# EAGLE board LSN Motherboard (EAGLE 6.2)
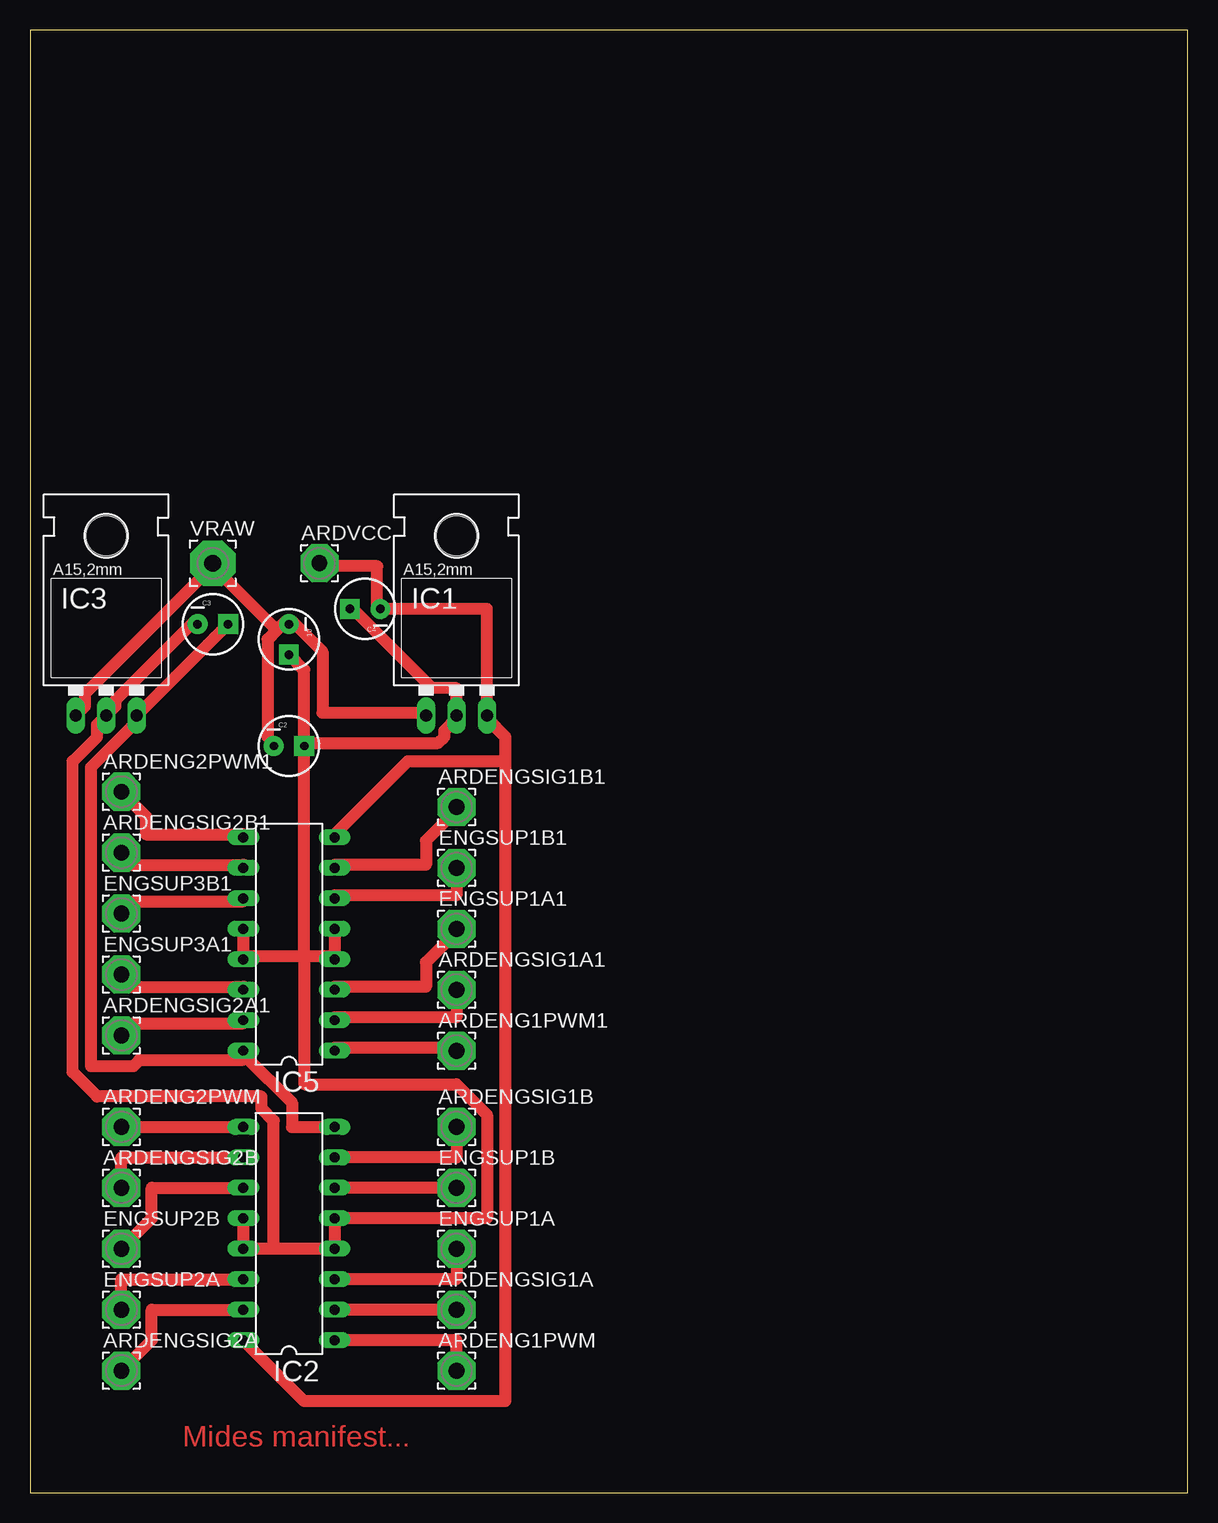
[diagram p0: board, top side]

Size 96.52 x 121.92 mm. Coordinates in mm from the lower left corner, seen from the top.
Outline: 0,0 96.52,0 96.52,121.92 0,121.92 0,0
Copper layers (1*16): Top 0.035mm / dielectric 1.5mm / Bottom 0.035mm
Design rules: minimum track width 40mil, minimum drill 24mil, track to track 10mil, track to pad 10mil, pad to pad 10mil, via to via 10mil, smd to smd 8mil, copper to edge 10mil, drill to drill 8mil, minimum pad ring 10mil, minimum via ring 8mil, stop-mask expansion 4mil, vias tented up to drill 0mil, thermal gap 10mil

## Footprints (pad centres in the part's own frame; a part is rotated, then mirrored left to right if it is on the bottom)
CPOL-RADIAL-10UF-25V = drill 0.7 pad 1.651 square: 1 1.27,0 | drill 0.7 pad 1.651: 2 -1.27,0
3,17/1,3 = drill 1.321 pad 3.175 octagon: 1 0,0
78XXL = drill 1.016 long: GND 0,-3.81; IN -2.54,-3.81; OUT 2.54,-3.81 | hole 3.302: 0,11.176
DIP16 = drill 0.813 long: 1 -10.16,-3.81; 2 -7.62,-3.81; 3 -5.08,-3.81; 4 -2.54,-3.81; 5 0,-3.81; 6 2.54,-3.81; 7 5.08,-3.81; 8 7.62,-3.81; 9 7.62,3.81; 10 5.08,3.81; 11 2.54,3.81; 12 0,3.81; 13 -2.54,3.81; 14 -5.08,3.81; 15 -7.62,3.81; 16 -10.16,3.81
3,81/1,4 = drill 1.397 pad 3.81 octagon: 1 0,0

## Placement (x,y rotation side)
10  10  [CPOL-RADIAL-10UF-25V]  21.59,71.12 270 top
ARDENG1PWM  Eng 1 Pwm  [3,17/1,3]  35.56,10.16 0 top
ARDENG1PWM1  Eng 1 Pwm  [3,17/1,3]  35.56,36.83 0 top
ARDENG2PWM  Eng2 Pwm  [3,17/1,3]  7.62,30.48 0 top
ARDENG2PWM1  Eng2 Pwm  [3,17/1,3]  7.62,58.42 0 top
ARDENGSIG1A  Eng Sig 1A  [3,17/1,3]  35.56,15.24 0 top
ARDENGSIG1A1  Eng Sig 1A  [3,17/1,3]  35.56,41.91 0 top
ARDENGSIG1B  Eng Sig 1B  [3,17/1,3]  35.56,30.48 0 top
ARDENGSIG1B1  Eng Sig 1B  [3,17/1,3]  35.56,57.15 0 top
ARDENGSIG2A  Eng Sig 2A  [3,17/1,3]  7.62,10.16 0 top
ARDENGSIG2A1  Eng Sig 2A  [3,17/1,3]  7.62,38.1 0 top
ARDENGSIG2B  Eng Sig 2B  [3,17/1,3]  7.62,25.4 0 top
ARDENGSIG2B1  Eng Sig 2B  [3,17/1,3]  7.62,53.34 0 top
ARDVCC  Ard VCC  [3,17/1,3]  24.13,77.47 0 top
C2  10  [CPOL-RADIAL-10UF-25V]  21.59,62.23 0 top
C3  .1  [CPOL-RADIAL-10UF-25V]  15.24,72.39 0 top
C4  .1  [CPOL-RADIAL-10UF-25V]  27.94,73.66 180 top
ENGSUP1A  Eng Sup 1A  [3,17/1,3]  35.56,20.32 0 top
ENGSUP1A1  Eng Sup 1A  [3,17/1,3]  35.56,46.99 0 top
ENGSUP1B  Eng Sup 1B  [3,17/1,3]  35.56,25.4 0 top
ENGSUP1B1  Eng Sup 1B  [3,17/1,3]  35.56,52.07 0 top
ENGSUP2A  Eng Sup 2A  [3,17/1,3]  7.62,15.24 0 top
ENGSUP2B  Eng Sup 2B  [3,17/1,3]  7.62,20.32 0 top
ENGSUP3A1  Eng Sup 2A  [3,17/1,3]  7.62,43.18 0 top
ENGSUP3B1  Eng Sup 2B  [3,17/1,3]  7.62,48.26 0 top
IC1  5v  [78XXL]  35.56,68.58 0 top
IC2  SN754410  [DIP16]  21.59,22.86 90 top
IC3  12v  [78XXL]  6.35,68.58 0 top
IC5  SN754410  [DIP16]  21.59,46.99 90 top
VRAW  VRaw  [3,81/1,4]  15.24,77.47 0 top

## Library data of the parts
10 C2-C4 = SparkFun
ARDENG1PWM ARDENG1PWM1 ARDENG2PWM ARDENG2PWM1 ARDENGSIG1A ARDENGSIG1A1 ARDENGSIG1B ARDENGSIG1B1 ARDENGSIG2A ARDENGSIG2A1 ARDENGSIG2B ARDENGSIG2B1 ARDVCC ENGSUP1A ENGSUP1A1 ENGSUP1B ENGSUP1B1 ENGSUP2A ENGSUP2B ENGSUP3A1 ENGSUP3B1 VRAW = wirepad
IC1 IC3 = v-reg
IC2 IC5 = HBridge

## Nets
ARDENGSIG1A: ARDENGSIG1A.1 IC2.2
ARDENGSIG1A1: ARDENGSIG1A1.1 IC5.2
ARDENGSIG1B: ARDENGSIG1B.1 IC2.7
ARDENGSIG1B1: ARDENGSIG1B1.1 IC5.7
ARDENGSIG2B: ARDENGSIG2B.1 IC2.10
ARDENGSIG2B1: ARDENGSIG2B1.1 IC5.10
GND: 10.1 C2.1 C3.2 C4.1 IC1.GND IC2.4 IC2.5 IC2.12 IC2.13 IC3.GND IC5.4 IC5.5 IC5.12 IC5.13
N$2: 10.2 C2.2 IC1.IN IC3.IN VRAW.1
N$3: ARDENG1PWM.1 IC2.1
N$4: ARDENG2PWM.1 IC2.9
N$6: ARDENGSIG2A.1 IC2.15
N$7: ARDENG1PWM1.1 IC5.1
N$8: ENGSUP1A.1 IC2.3
N$9: ENGSUP1B.1 IC2.6
N$10: ENGSUP2B.1 IC2.11
N$11: ENGSUP2A.1 IC2.14
N$12: C3.1 IC2.8 IC3.OUT IC5.16
N$13: ARDENG2PWM1.1 IC5.9
N$14: ARDENGSIG2A1.1 IC5.15
N$15: ENGSUP1A1.1 IC5.3
N$16: ENGSUP1B1.1 IC5.6
N$17: ENGSUP3B1.1 IC5.11
N$18: ENGSUP3A1.1 IC5.14
N$19: ARDVCC.1 C4.2 IC1.OUT IC2.16 IC5.8

## Tracks (layer width: path | path; a pad name or v marks a point on that pad's centre or on a via)
ARDENGSIG1A
  Top 1.016: ARDENGSIG1A.1 IC2.2
ARDENGSIG1A1
  Top 1.016: ARDENGSIG1A1.1 35.56,39.62 25.4,39.62 IC5.2
ARDENGSIG1B
  Top 1.016: IC2.7 35.56,27.94 ARDENGSIG1B.1
ARDENGSIG1B1
  Top 1.016: IC5.7 25.4,52.32 33.02,52.32 33.02,54.36 35.56,56.9 ARDENGSIG1B1.1
ARDENGSIG2B
  Top 1.016: IC2.10 7.62,27.94 ARDENGSIG2B.1
ARDENGSIG2B1
  Top 1.016: ARDENGSIG2B1.1 7.62,52.32 17.78,52.32 IC5.10
GND
  Top 1.016: 22.86,62.48 34.04,62.48 34.54,62.99 34.54,63.5 35.56,64.52 IC1.GND 35.56,67.06 33.53,67.06 26.92,73.66 C4.1 | 10.1 22.86,68.58 22.86,62.48 | 22.86,62.48 C2.1 22.86,44.7 | C3.2 13.72,72.64 7.11,66.04 7.11,65.53 IC3.GND 5.59,64.01 5.59,62.99 3.56,60.96 3.56,35.05 5.59,33.02 19.3,33.02 19.3,32 20.32,30.99 20.32,20.32 | IC2.12 IC2.13 20.32,20.32 | 20.32,20.32 IC2.4 IC2.5 38.1,22.86 38.1,31.5 35.56,34.04 22.86,34.04 22.86,44.7 | IC5.12 17.78,44.7 | IC5.5 25.4,44.7 | 25.4,44.7 22.86,44.7 | 22.86,44.7 17.78,44.7 | 17.78,44.7 IC5.13 | 25.4,44.7 IC5.4
N$2
  Top 1.016: IC1.IN 33.02,65.02 24.38,65.02 24.38,70.1 21.84,72.64 10.2 21.34,72.64 20.57,71.88 | 20.57,71.88 19.81,71.12 19.81,62.99 20.32,62.48 C2.2 | IC3.IN 4.57,65.53 4.57,66.55 15.24,77.22 | 15.24,77.22 20.57,71.88 | 15.24,77.22 VRAW.1
N$3
  Top 1.016: IC2.1 35.56,12.7 ARDENG1PWM.1
N$4
  Top 1.016: ARDENG2PWM.1 IC2.9
N$6
  Top 1.016: IC2.15 10.16,15.24 10.16,12.7 ARDENGSIG2A.1
N$7
  Top 1.016: IC5.1 25.4,37.08 35.56,37.08 ARDENG1PWM1.1
N$8
  Top 1.016: IC2.3 35.56,17.78 ENGSUP1A.1
N$9
  Top 1.016: ENGSUP1B.1 IC2.6
N$10
  Top 1.016: IC2.11 10.16,25.4 10.16,22.86 ENGSUP2B.1
N$11
  Top 1.016: IC2.14 7.62,17.78 ENGSUP2A.1
N$12
  Top 1.016: IC2.8 21.84,30.48 21.84,32.51 18.03,36.32 | 18.03,36.32 17.78,36.58 IC5.16 | C3.1 IC3.OUT 8.64,64.52 8.64,64.01 5.08,60.45 5.08,35.56 8.64,35.56 9.14,36.07 17.78,36.07 18.03,36.32
N$13
  Top 1.016: ARDENG2PWM1.1 9.65,56.39 9.65,54.86 17.78,54.86 IC5.9
N$14
  Top 1.016: ARDENGSIG2A1.1 7.62,39.12 17.78,39.12 IC5.15
N$15
  Top 1.016: IC5.3 25.4,42.16 33.02,42.16 33.02,44.2 35.56,46.74 ENGSUP1A1.1
N$16
  Top 1.016: ENGSUP1B1.1 35.56,49.78 25.4,49.78 IC5.6
N$17
  Top 1.016: ENGSUP3B1.1 7.62,49.28 17.78,49.28 IC5.11
N$18
  Top 1.016: ENGSUP3A1.1 7.62,42.16 17.78,42.16 IC5.14
N$19
  Top 1.016: IC2.16 22.86,7.62 39.62,7.62 39.62,60.96 | 39.62,60.96 39.62,62.99 38.1,64.52 IC1.OUT 38.1,73.66 C4.2 28.96,73.66 28.96,77.22 24.38,77.22 ARDVCC.1 | 39.62,60.96 31.5,60.96 25.4,54.86 IC5.8

## Text on the board
Top: Mides manifest...